# Altium PCB VoltTap.PcbDoc
Units mm, origin at the board's own origin, x right, y up, seen from the top; angles counter-clockwise.
Board outline 119.38 x 51.82 mm, 2 copper layers (Top Layer, Bottom Layer), stack 1.57 mm thick; 39 components, 38 nets, 107 pads, 0 vias.
Unrouted connection lines stored in the file: 1.
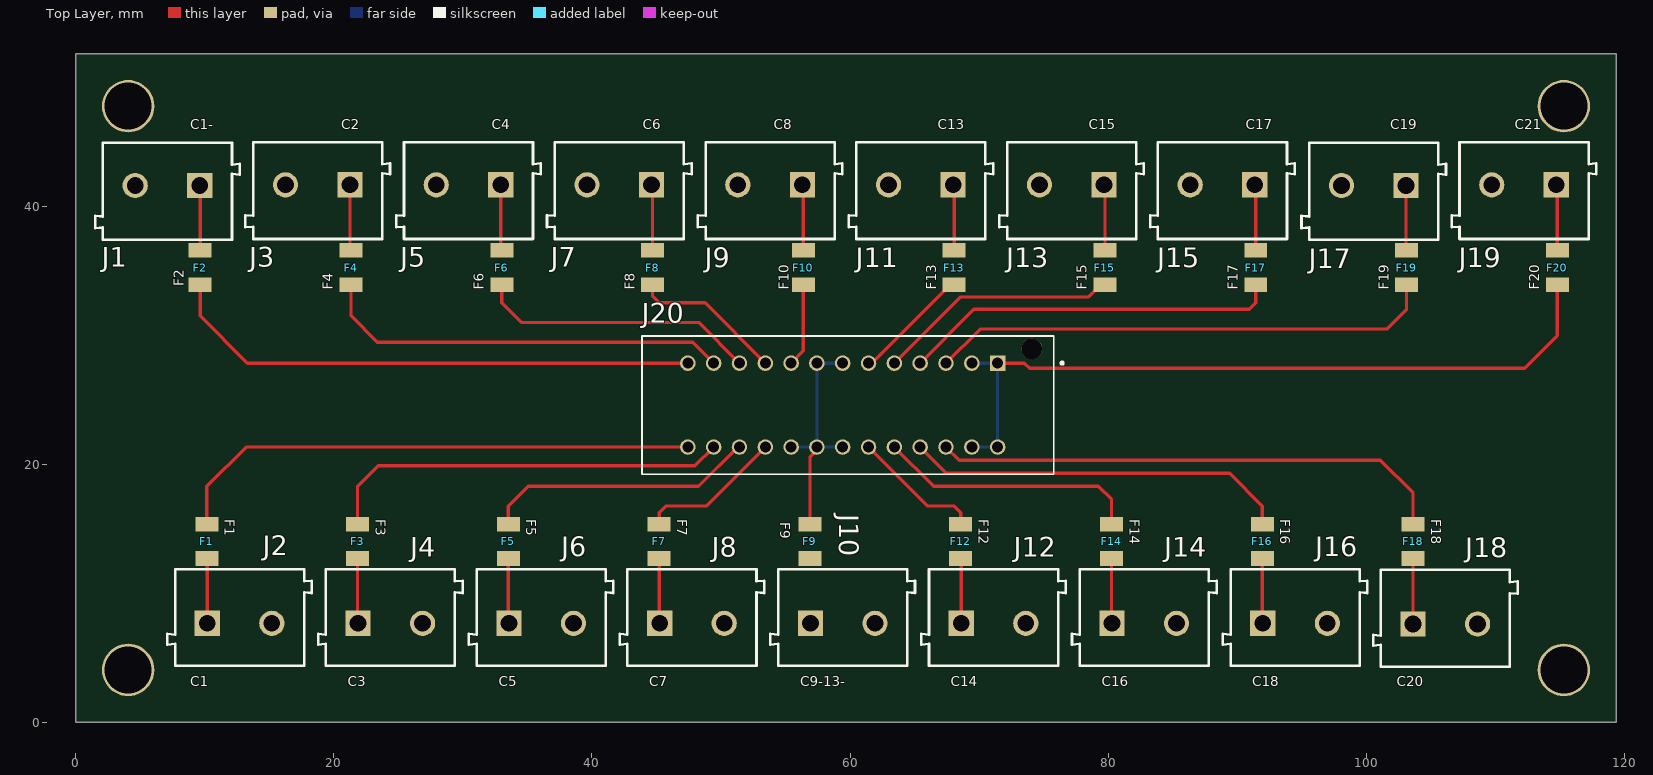
[diagram p0: Top Layer view]
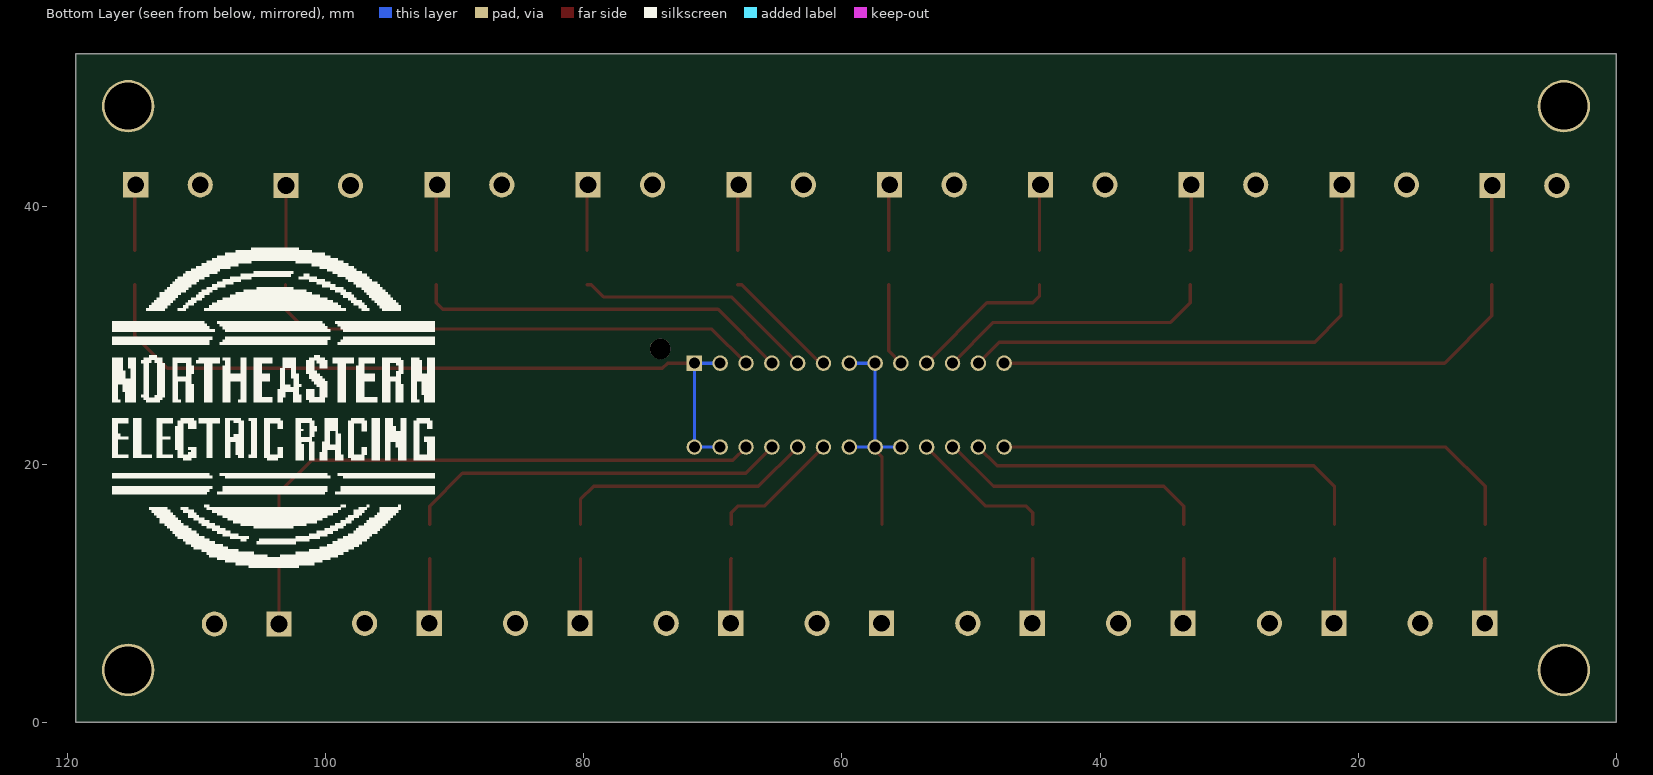
[diagram p1: Bottom Layer view, seen from below]
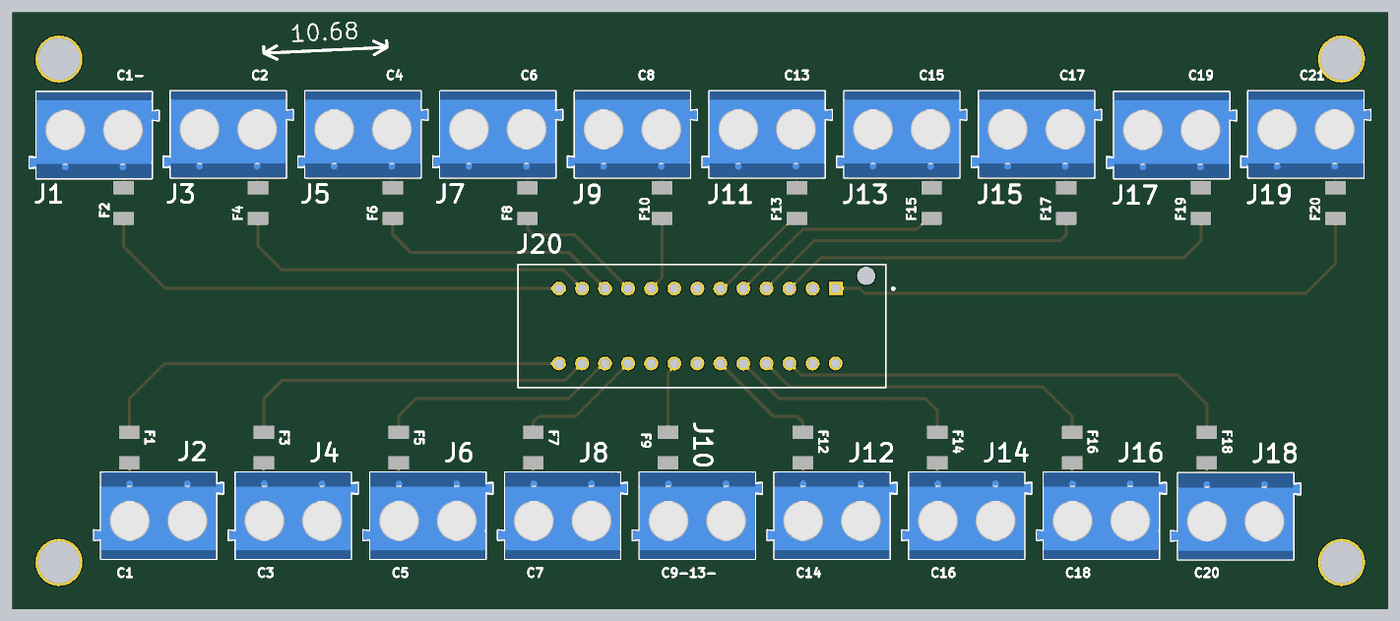
[diagram p2: 3D render of the assembled board from above, using the file's embedded part models]

## Layer stack, top to bottom
Top Solder: solder mask 0.0102, Solder Resist, Dk 3.5
Top Layer: signal copper 0.0356
Dielectric 1: core 1.4986, Core-043, Dk 4.3
Bottom Layer: signal copper 0.0356
Bottom Solder: solder mask 0.0102, Solder Resist, Dk 3.5

## Board outline
0,0 119.38,0 119.38,51.816 0,51.816

## Design rules (kind name [scope] priority, off if disabled: settings)
Clearance [All] p1: gap=0.254 ignorepadtopadclearanceinfootprint=FALSE except(0: Arc-Hole Track-Hole SMDPad-Hole THPad-Hole Via-Hole Fill-Hole Poly-Hole Region-Hole Text-Hole)
PolygonConnect [All] p1: connectstyle=Relief reliefconductorwidth=0.254 reliefentries=4 polygonreliefangle="90 Angle" airgapwidth=0.254
RoomDefinition VoltTap [InComponentClass('VoltTap')] p1: confinementstyle=ConfineIn formatcopy=TRUE lockcomponents=FALSE outline 154.559,2.54 447.421,2.54 447.421,75.184 154.559,75.184
RoutingVias [All] p1: holewidth=0.711 width=1.27 viastyle="Through Hole" minholewidth=0.711 minwidth=1.27 maxholewidth=0.711 maxwidth=1.27
SolderMaskExpansion [All] p1: expansion=0.102 istentingtop=FALSE
Width [All] p1: maxlimit=0.254 minlimit=0.254 preferedwidth=0.254
30 further rules are at their usual default settings.

## Components (designator, comment, footprint, x,y, rotation, side; value= is the part's Value field where it differs from the comment)
F1 "C1T5" C1T5 10.16,15.36 r270 top
F2 "C1T5" C1T5 9.652,36.576 r270 top
F3 "C1T5" C1T5 21.844,15.36 r270 top
F4 "C1T5" C1T5 21.336,33.916 r90 top
F5 "C1T5" C1T5 33.528,15.36 r270 top
F6 "C1T5" C1T5 33.02,33.916 r90 top
F7 "C1T5" C1T5 45.212,15.36 r270 top
F8 "C1T5" C1T5 44.704,33.916 r90 top
F9 "C1T5" C1T5 56.896,15.36 r270 top
F10 "C1T5" C1T5 56.388,33.916 r90 top
F12 "C1T5" C1T5 68.58,15.36 r270 top
F13 "C1T5" C1T5 68.072,33.916 r90 top
F14 "C1T5" C1T5 80.264,15.36 r270 top
F15 "C1T5" C1T5 79.756,33.916 r90 top
F16 "C1T5" C1T5 91.948,15.36 r270 top
F17 "C1T5" C1T5 91.44,33.916 r90 top
F18 "C1T5" C1T5 103.632,15.36 r270 top
F19 "C1T5" C1T5 103.124,33.916 r90 top
F20 "C1T5" C1T5 114.808,33.916 r90 top
J1 "691102710002" 691102710002 7.112,41.148 r180 top
J2 "691102710002" 691102710002 12.7,8.128 r0 top
J3 "691102710002" 691102710002 18.756,41.206 r180 top
J4 "691102710002" 691102710002 24.384,8.128 r0 top
J5 "691102710002" 691102710002 30.44,41.206 r180 top
J6 "691102710002" 691102710002 36.068,8.128 r0 top
J7 "691102710002" 691102710002 42.124,41.206 r180 top
J8 "691102710002" 691102710002 47.752,8.128 r0 top
J9 "691102710002" 691102710002 53.808,41.206 r180 top
J10 "691102710002" 691102710002 59.436,8.128 r0 top
J11 "691102710002" 691102710002 65.492,41.206 r180 top
J12 "691102710002" 691102710002 71.12,8.128 r0 top
J13 "691102710002" 691102710002 77.176,41.206 r180 top
J14 "691102710002" 691102710002 82.804,8.128 r0 top
J15 "691102710002" 691102710002 88.86,41.206 r180 top
J16 "691102710002" 691102710002 94.488,8.128 r0 top
J17 "691102710002" 691102710002 100.584,41.148 r180 top
J18 "691102710002" 691102710002 106.132,8.07 r0 top
J19 "691102710002" 691102710002 112.228,41.206 r180 top
J20 "2-292141-6" TE_2-292141-6 71.436,27.836 r180 top

## Footprints (in the part's own frame and the unit in brackets; to place one, negate y for a bottom-side part, rotate by r counter-clockwise, add the part's x,y. Pads: shape width x height; smd on the part's side, far side on the other; paste and mask are expansions set on the pad)
691102710002 [mm] "5,00mm - modular - blue - Horizontal entry with pressure clamp - 9,9 mm height - 02p"
  rect 1.95x1.95 hole 1.3: 1(-2.5,-0.45)
  round 1.95 hole 1.3: 2(2.5,-0.45)
  silkscreen extent -5.6,-3.75 5.6,3.75, body extent -5.6,-3.75 5.6,3.75, height 9.96
C1T5 [mm]
  rect 1.14x1.78 smd mask+0.025: 1(0,0) 2(2.66,0)
  body extent -0.3,-0.79 2.9,0.79, height 0.61
TE_2-292141-6 [mm]
  rect 1.2x1.2 hole 0.85: 1(0,0)
  round 1.2 hole 0.85: 2(2,0) 3(4,0) 4(6,0) 5(8,0) 6(10,0) 7(12,0) 8(14,0) 9(16,0) 10(18,0) 11(20,0) 12(22,0) 13(24,0) 14(0,6.5) 15(2,6.5) 16(4,6.5) 17(6,6.5) 18(8,6.5) 19(10,6.5) 20(12,6.5) 21(14,6.5) 22(16,6.5) 23(18,6.5) 24(20,6.5) 25(22,6.5) 26(24,6.5)
  round 1.6 hole 1.6 unplated: ""(-2.65,-1.1)
  silkscreen extent -5.1,-2.1 27.55,8.6

## Part data
J1 J2 J3 J4 J5 J6 J7 J8 J9 J10 J11 J12 J13 J14 J15 J16 J17 J18 J19: library part CMP-1502-03258-1, "Series 102 - 5.00 mm Horizontal Entry Modular with Pressure Clamp WR-TBL, 2 pin", Manufacturer="Wurth Elektronik", Operating Temperature=-40to105degC, Datasheet URL=http://katalog.we-online.de/em/datasheet/6911027100xx.pdf, Manufacturer URL=http://www.we-online.de, Mounting Technology=THT, Package Reference=691102710002, Packaging=Box, Part Number=691102710002, Pin Number=2, Pitch=5.00mm, Publisher=WurthElektronik
J20: Package=None, Availability=Unavailable, MF="{'manufacturer': 'TE Connectivity'}", MP=2-292141-6, Price=None
F1 F2 F3 F4 F5 F6 F7 F8 F9 F10 F12 F13 F14 F15 F16 F17 F18 F19 F20: ComponentLink1Description="New link", ComponentLink1URL=https://www.mouser.com/ProductDetail/Bel-Fuse/C1T5?qs=GtFly9OVs8%2FF1GxRAaUoTA%3D%3D#.Xzf8gWXWqWc.link

## Free pads (board coordinates)
  round 4.064 hole 3.658: 4(115.316,47.752) 5(115.316,4.064) 6(4.064,47.752) 7(4.064,4.064)

## Nets (pads, with @x,y where several pads share a name; then routed paths per layer and width w, separated by ;. In a path a pad name is that pad's centre, name@x,y a point inside that pad or via, vN(x,y) a via of type N, cw(c..) or ccw(c..) an arc to the next point about the centre after c; other vN are vias at no path point)
NetF1_1: F1.1 J20.26 | length 41.5
  Top Layer w0.254: F1.1 10.16,18.288 13.208,21.336 J20.26
NetF1_2: F1.2 J2.1 | length 5
  Top Layer w0.254: F1.2 10.2,12.66 J2.1
NetF2_1: F2.1 J1.1 | length 5
  Top Layer w0.254: J1.1 9.652,41.558 F2.1
NetF2_2: F2.2 J20.13 | length 41.7
  Top Layer w0.254: F2.2 9.652,31.496 13.312,27.836 J20.13
NetF3_1: F3.1 J20.25 | length 31.8
  Top Layer w0.254: F3.1 21.844,18.288 23.441,19.885 47.985,19.885 J20.25
NetF3_2: F3.2 J4.1 | length 5
  Top Layer w0.254: F3.2 21.844,7.718 J4.1
NetF4_1: F4.1 J20.12 | length 32
  Top Layer w0.254: F4.1 21.336,31.496 23.368,29.464 47.808,29.464 J20.12
NetF4_2: F4.2 J3.1 | length 5.1
  Top Layer w0.254: J3.1 21.256,36.656 F4.2
NetF5_1: F5.1 J20.24 | length 21.2
  Top Layer w0.254: F5.1 33.528,16.764 35.052,18.288 48.26,18.288 51.308,21.336 J20.24
NetF5_2: F5.2 J6.1 | length 5
  Top Layer w0.254: F5.2 33.528,7.718 J6.1
NetF6_1: F6.1 J20.11 | length 21.8
  Top Layer w0.254: F6.1 33.02,32.512 34.544,30.988 48.284,30.988 J20.11
NetF6_2: F6.2 J5.1 | length 5.1
  Top Layer w0.254: J5.1 32.94,36.656 F6.2
NetF7_1: F7.1 J20.23 | length 11.2
  Top Layer w0.254: F7.1 45.212,16.256 45.72,16.764 48.864,16.764 J20.23
NetF7_2: F7.2 J8.1 | length 5
  Top Layer w0.254: F7.2 45.212,7.718 J8.1
NetF8_1: F8.1 J20.10 | length 11.8
  Top Layer w0.254: F8.1 44.704,33.02 45.212,32.512 48.768,32.512 53.436,27.844 J20.10
NetF8_2: F8.2 J7.1 | length 5.1
  Top Layer w0.254: J7.1 44.704,41.576 F8.2
NetF9_1: F9.1 J20.7 J20.8 J20.20 J20.21 J20.22 | length 19
  Top Layer w0.254: J20.22@55.372,21.272 J20.22 J20.22@55.436,21.579 ; F9.1 56.896,20.54 57.436,21.08 J20.21
  Bottom Layer w0.254: J20.22 J20.21 ; J20.20 J20.21 ; J20.7 J20.8 J20.21
NetF9_2: F9.2 J10.1 | length 0.1
  Top Layer w0.254: J10.1@56.896,7.718 J10.1
NetF10_1: F10.1 J20.9 | length 6.5
  Top Layer w0.254: J20.9 56.388,28.788 F10.1
NetF10_2: F10.2 J9.1 | length 5.1
  Top Layer w0.254: J9.1 56.388,41.576 F10.2
NetF12_1: F12.1 J20.19 | length 10.1
  Top Layer w0.254: J20.19 66.008,16.764 68.072,16.764 68.58,16.256 F12.1
NetF12_2: F12.2 J12.1 | length 5
  Top Layer w0.254: F12.2 68.62,12.66 J12.1
NetF13_1: F13.1 J20.6 | length 9.2
  Top Layer w0.254: J20.6 61.672,27.836 67.752,33.916 F13.1
NetF13_2: F13.2 J11.1 | length 5.1
  Top Layer w0.254: J11.1 68.072,41.576 F13.2
NetF14_1: F14.1 J20.18 | length 20.4
  Top Layer w0.254: J20.18 66.484,18.288 79.248,18.288 80.264,17.272 F14.1
NetF14_2: F14.2 J14.1 | length 5
  Top Layer w0.254: F14.2 80.264,7.718 J14.1
NetF15_1: F15.1 J20.5 | length 18.8
  Top Layer w0.254: J20.5 68.565,32.965 78.485,32.965 79.436,33.916 F15.1
NetF15_2: F15.2 J13.1 | length 5.1
  Top Layer w0.254: J13.1 79.756,41.576 F15.2
NetF16_1: F16.1 J20.17 | length 29.8
  Top Layer w0.254: J20.17 67.468,19.304 89.408,19.304 91.948,16.764 F16.1
NetF16_2: F16.2 J16.1 | length 5
  Top Layer w0.254: F16.2 91.948,7.718 J16.1
NetF17_1: F17.1 J20.4 | length 29.3
  Top Layer w0.254: J20.4 69.604,32.004 90.932,32.004 91.44,32.512 F17.1
NetF17_2: F17.2 J15.1 | length 5.1
  Top Layer w0.254: J15.1 91.44,41.576 F17.2
NetF18_1: F18.1 J20.16 | length 40.1
  Top Layer w0.254: J20.16 68.452,20.32 101.092,20.32 103.632,17.78 F18.1
NetF18_2: F18.2 J18.1 | length 5.1
  Top Layer w0.254: J18.1 F18.2
NetF19_1: F19.1 J20.3 | length 39.3
  Top Layer w0.254: J20.3 70.08,30.48 101.6,30.48 103.124,32.004 F19.1
NetF19_2: F19.2 J17.1 | length 5
  Top Layer w0.254: J17.1 103.084,36.616 F19.2
NetF20_1: F20.1 J20.1 J20.2 J20.14 J20.15 | length 59
  Top Layer w0.254: J20.1 73.516,27.836 73.92,27.432 112.268,27.432 114.808,29.972 F20.1
  Bottom Layer w0.254: J20.15 J20.14 J20.1 J20.2
NetF20_2: F20.2 J19.1 | length 5.1
  Top Layer w0.254: J19.1 114.808,41.576 F20.2
pads on no net: J1.2 J2.2 J3.2 J4.2 J5.2 J6.2 J7.2 J8.2 J9.2 J10.2 J11.2 J12.2 J13.2 J14.2 J15.2 J16.2 J17.2 J18.2 J19.2 J20.

## Silkscreen, mask and mechanical layers (free items; w line width, h text height)
Top Overlay:
  text "C1-" at 8.89,45.974 h0.76
  text "C2" at 20.574,45.974 h0.76
  text "C4" at 32.258,45.974 h0.76
  text "C6" at 43.942,45.974 h0.76
  text "C8" at 54.102,45.974 h0.76
  text "C13" at 66.802,45.974 h0.76
  text "C15" at 78.486,45.974 h0.76
  text "C17" at 90.678,45.974 h0.76
  text "C19" at 101.854,45.974 h0.76
  text "C21" at 111.506,45.974 h0.76
  text "C1" at 8.89,2.794 h0.76
  text "C3" at 21.082,2.794 h0.76
  text "C5" at 32.766,2.794 h0.76
  text "C7" at 44.45,2.794 h0.76
  text "C9-13-" at 56.134,2.794 h0.76
  text "C14" at 67.818,2.794 h0.76
  text "C16" at 79.502,2.794 h0.76
  text "C18" at 91.186,2.794 h0.76
  text "C20" at 102.362,2.794 h0.76
Bottom Overlay:
  drawing of 46 lines, arcs and shapes, not listed
Board Outline:
  the board outline again, w0.254

## Dimensions
21.844,48.26 to 32.512,48.768 on Top Overlay